# Altium PCB PCBenDIM.PcbDoc (part 1 of 3)
Units mil, origin at the board's own origin, x right, y up, seen from the top; angles counter-clockwise.
Board outline 3937.01 x 3149.61 mil, 2 copper layers (Top Layer, Bottom Layer); 105 components, 104 nets, 450 pads, 157 vias.
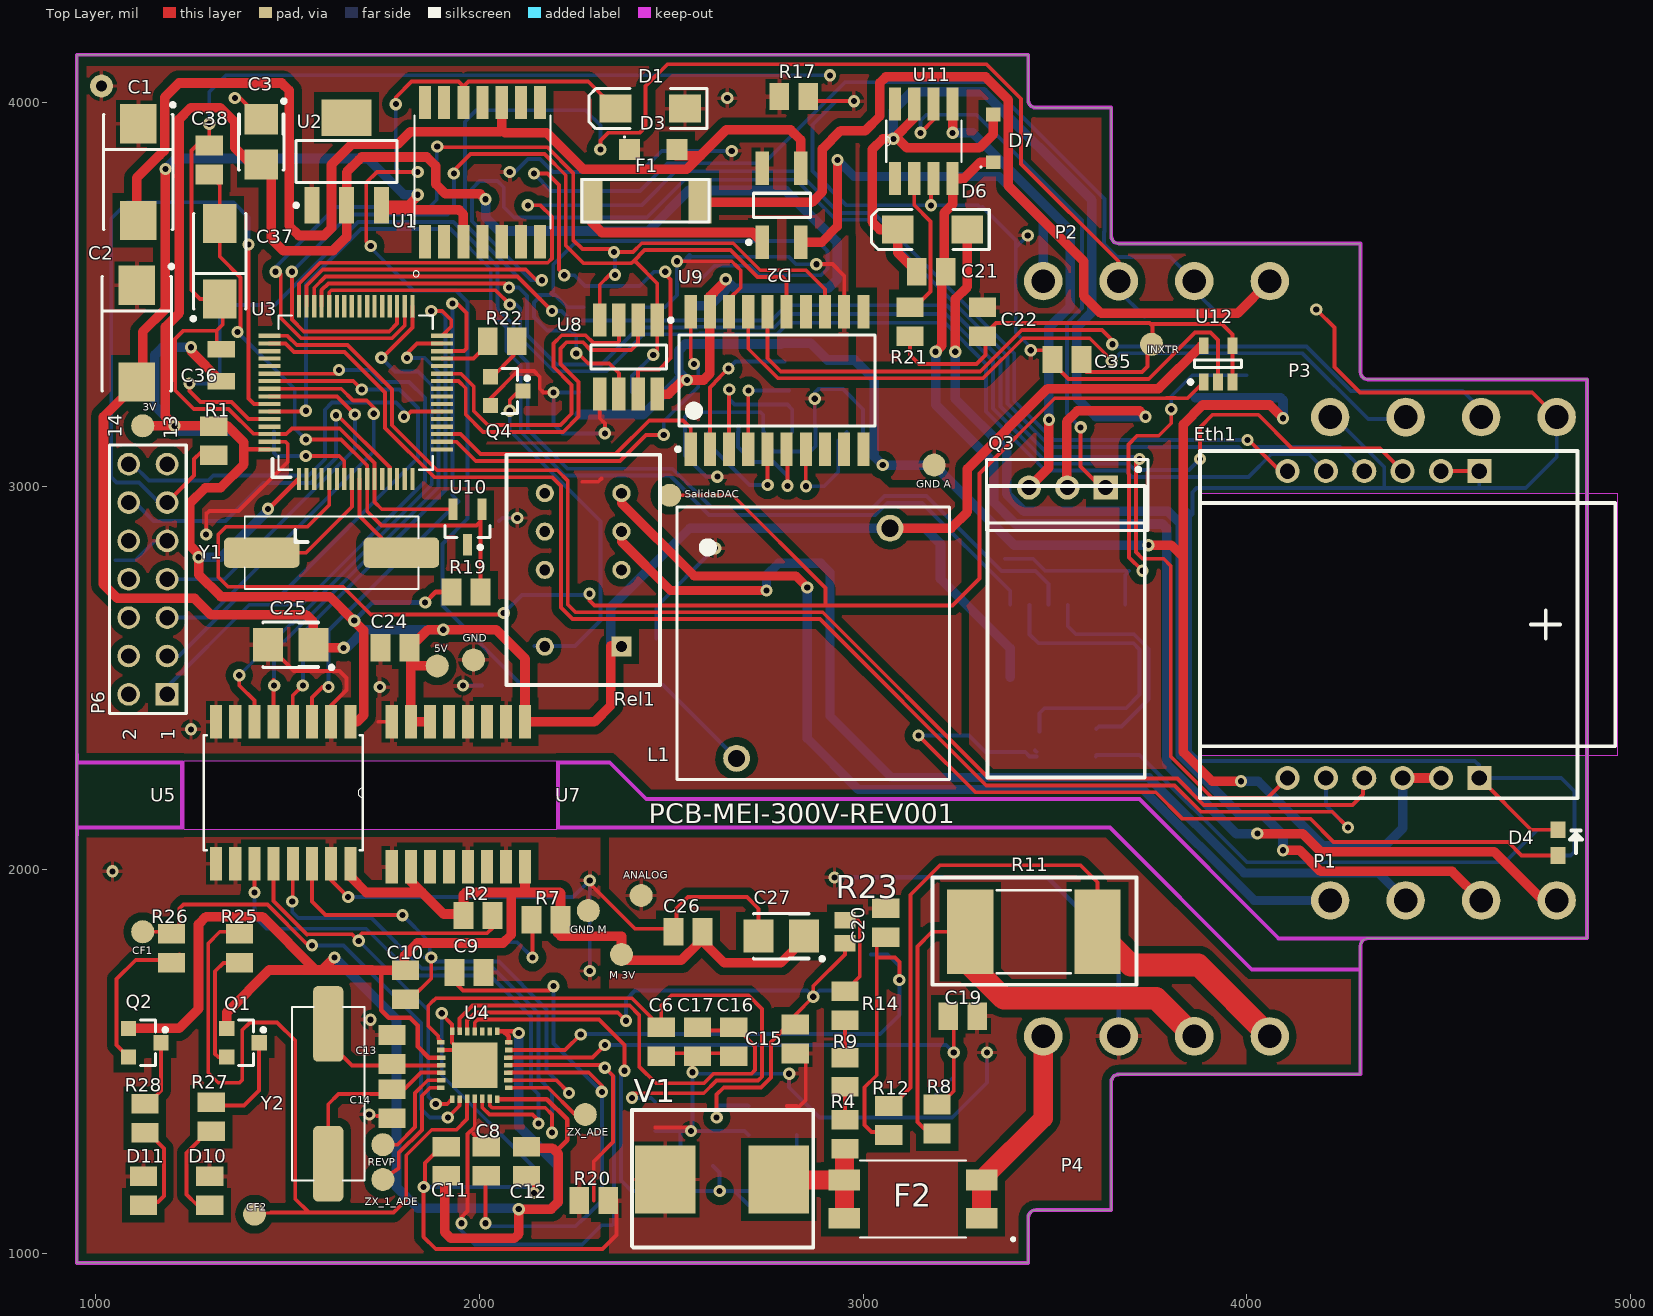
[diagram p0: Top Layer view]
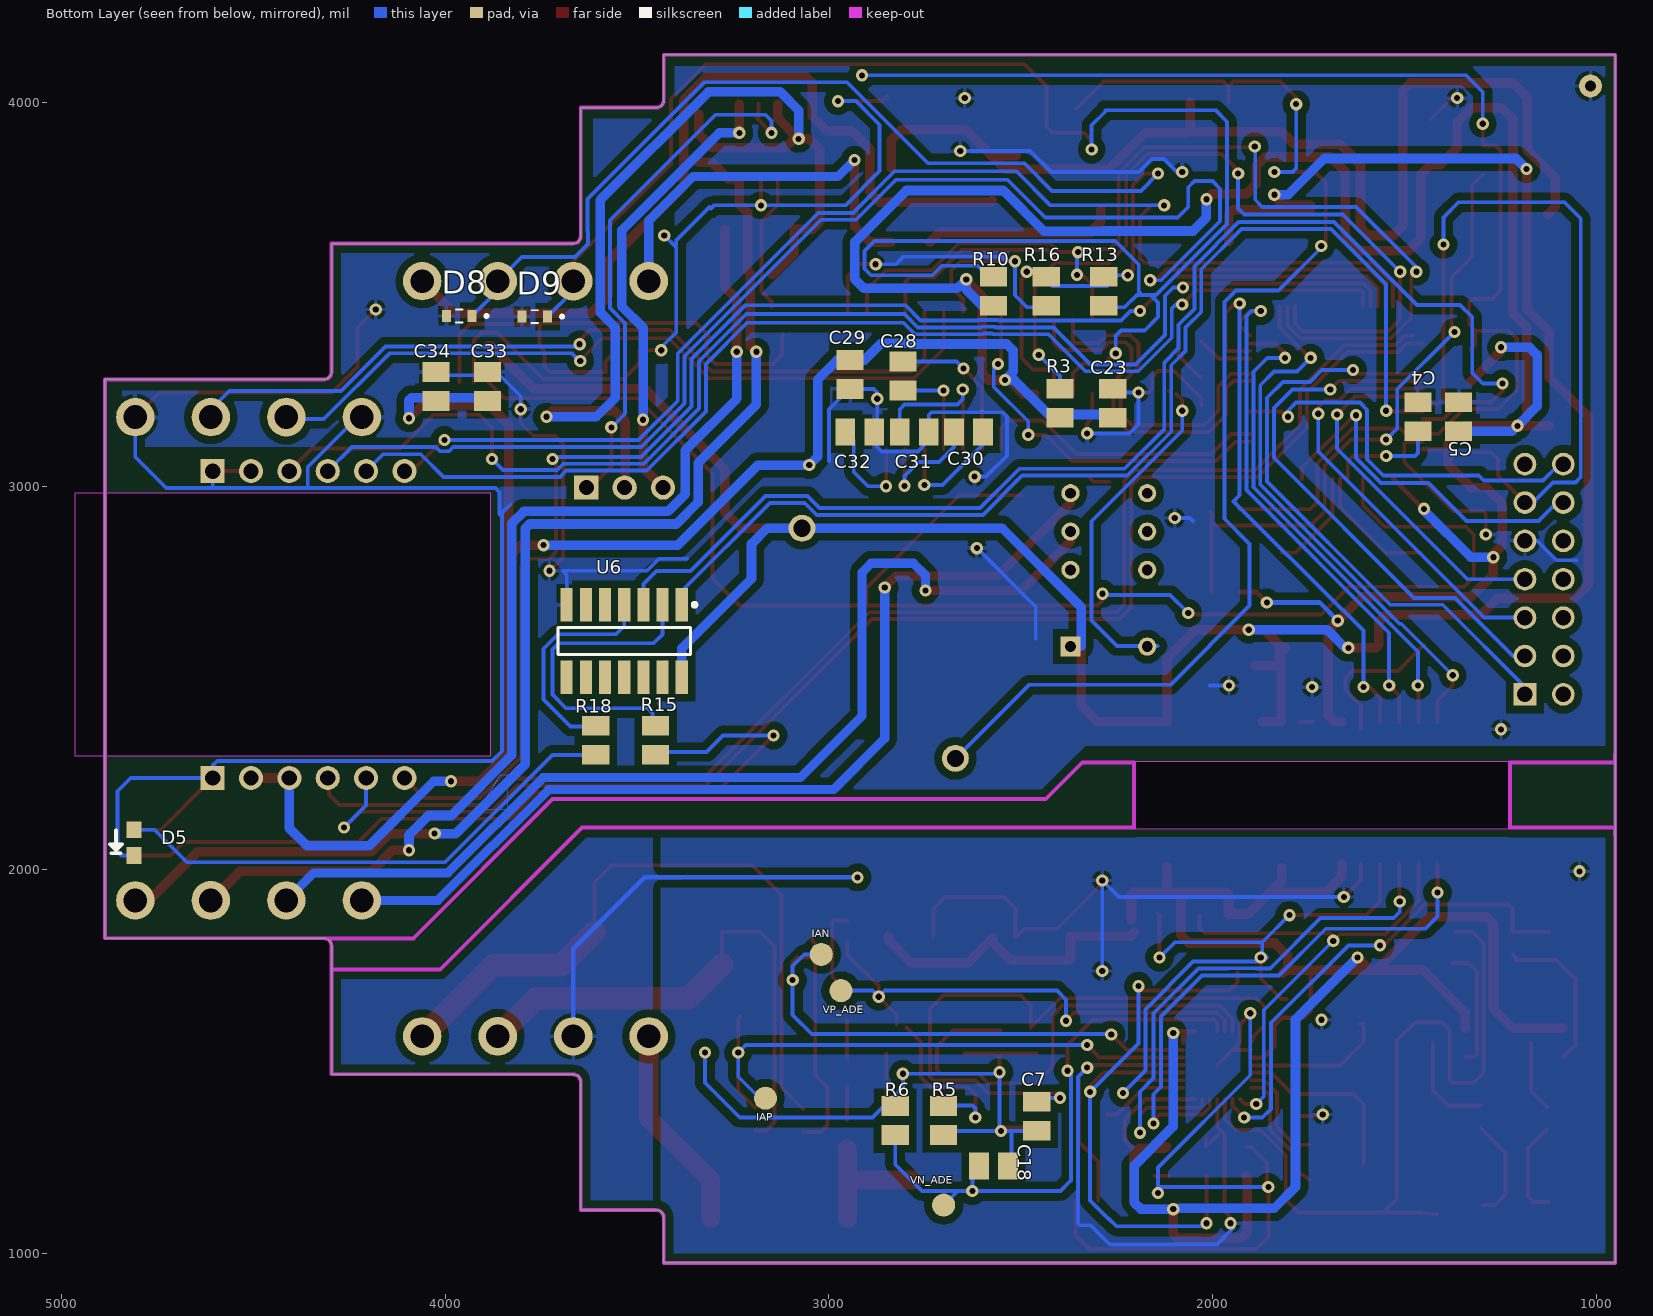
[diagram p1: Bottom Layer view, seen from below]

## Layer stack, top to bottom
Top Solder: solder mask 0.4, Solder Resist, Dk 3.5
Top Layer: signal copper 1.4
Dielectric 1: dielectric 12.6, FR-4, Dk 4.8
Bottom Layer: signal copper 1.4
Bottom Solder: solder mask 0.4, Solder Resist, Dk 3.5

## Board outline
4296.46,3298.03 4296.46,3632.68 3666.54,3632.68 3662.16,3633.17 3658,3634.63 3654.26,3636.97 3651.15,3640.09 3648.8,3643.82 3647.34,3647.98 3646.85,3652.36 3646.85,3987.01 3450,3987.01 3445.62,3987.5 3441.46,3988.96 3437.73,3991.3 3434.61,3994.42 3432.27,3998.15 3430.81,4002.31 3430.32,4006.69 3430.32,4124.8 950,4124.8 950,975.2 3430.32,975.2 3430.32,1093.31 3430.81,1097.69 3432.27,1101.85 3434.61,1105.58 3437.73,1108.7 3441.46,1111.04 3445.62,1112.5 3450,1112.99 3646.85,1112.99 3646.85,1447.05 3647.34,1451.42 3648.8,1455.58 3651.14,1459.31 3654.25,1462.43 3657.98,1464.78 3662.14,1466.23 3666.52,1466.73 4296.46,1467.32 4296.46,1801.97 4296.95,1806.35 4298.41,1810.51 4300.75,1814.24 4303.87,1817.36 4307.6,1819.7 4311.76,1821.16 4316.14,1821.65 4887.01,1821.65 4887.01,3278.35 4316.14,3278.35 4311.76,3278.84 4307.6,3280.3 4303.87,3282.64 4300.75,3285.76 4298.41,3289.49 4296.95,3293.65
cut-out: 3881.89,2982.28 4965.64,2982.28 4965.64,2297.64 3881.89,2297.64
cut-out: 1228.35,2283.46 1228.35,2106.3 2200.79,2106.3 2200.79,2283.46

## Design rules (kind name [scope] priority, off if disabled: settings)
Clearance Poly [InPolygon] p1: gap=20.47 ignorepadtopadclearanceinfootprint=FALSE except(0: Arc-Hole Track-Hole SMDPad-Hole THPad-Hole Via-Hole Fill-Hole Poly-Hole Region-Hole Text-Hole)
Clearance Clearancedos [HasPad('U3-*','U4-*') vs HasPad('U3-*','U4-*')] p2 off: gap=7.87 ignorepadtopadclearanceinfootprint=FALSE except(0: Arc-Hole Track-Hole SMDPad-Hole THPad-Hole Via-Hole Fill-Hole Poly-Hole Region-Hole Text-Hole; 3.94: Arc-SMDPad Track-SMDPad SMDPad-SMDPad)
Clearance [All] p3: gap=7.87 ignorepadtopadclearanceinfootprint=FALSE except(0: Arc-Hole Track-Hole SMDPad-Hole THPad-Hole Via-Hole Fill-Hole Poly-Hole Region-Hole Text-Hole; 5.91: Arc-SMDPad Track-SMDPad SMDPad-SMDPad)
MinimumSolderMaskSliver [All] p1: minsoldermaskwidth=0.04
PolygonConnect [All] p1: connectstyle=Relief reliefconductorwidth=10 reliefentries=4 polygonreliefangle="90 Angle" airgapwidth=10
RoutingVias [All] p1: holewidth=16 width=32 viastyle="Through Hole" minholewidth=16 minwidth=32 maxholewidth=16 maxwidth=32
SilkToSilkClearance [All] p1: silktosilkclearance=0
SilkToSolderMaskClearance [IsPad] p1: minsilkscreentomaskgap=0 clearancetoexposedcopper=TRUE
SolderMaskExpansion [All] p1: expansion=3.94
Width 4milimeter [InNet('NetQ3_3','NetC21_2','SAL3','SAL4')] p1: maxlimit=27.56 minlimit=25 preferedwidth=25 minimp=50.000000 maximp=50.000000 favimp=50.000000
Width [InAnyNet and not InNet('M_V3V3','V3V3','NetP1_4','NetP1_3','V5')   and not InNet('CURRENT_MEASUREMENTA','CURRENT_MEASUREMENTB')  and not InNet('AC_N_MEDIDOR','AC_p_MEDIDOR')  and not InNet('NetQ4_3')] p2: maxlimit=60 minlimit=10 preferedwidth=10 minimp=50.000000 maximp=50.000000 favimp=50.000000
Width 3Vade [InNet('M_V3V3','V3V3','NetP1_4','NetP1_3','V5')] p3: maxlimit=80 minlimit=12 preferedwidth=12 minimp=50.000000 maximp=50.000000 favimp=50.000000
27 further rules are at their usual default settings.

## Classes and differential pairs
component class Alimentacion: C1 C2 C3 C24 C25 C26 C27 D1 D2 D3 F1 L1 P1 P2 U1 U2 U7
component class CircuitoMedidorADE: C6 C7 C8 C9 C10 C11 C12 C13 C14 C16 C17 D10 D11 Q1 Q2 R2 R7 R20 R25 R26 R27 R28 U4 U5 Y2
component class comms: C23 C28 C29 C30 C31 C32 C33 C34 D4 D5 D8 D9 Eth1 P3 R3 R10 R13 R15 R16 R18 U6 U8 U9
component class Micro: C4 C5 C36 C37 C38 P6 R1 R17 R19 U3 U10 Y1
component class ParteAnalogicaMedicion: C15 C18 C19 C20 F2 P4 R4 R5 R6 R8 R9 R11 R12 R14 R23 V1
component class "Relay y salida analógica": C21 C22 C35 D6 D7 Q3 Q4 R21 R22 Rel1 U11 U12

## Components (designator, comment, footprint, x,y, rotation, side; value= is the part's Value field where it differs from the comment)
C1 "Cap Semi" 7343 1110.24,3818.9 r270 top value=22uF
C2 "Cap Semi" 7343 1106.3,3397.64 r270 top value=220uF
C3 "Cap Semi" 3528 1430.94,3897.64 r270 top value=10uF
C4 "Cap Semi" Custom0805 1464.57,3181.1 r270 bottom value=0.1uF
C5 "Cap Semi" Custom0805 1358.27,3181.1 r270 bottom value=0.1uF
C6 "Cap Pol3" Custom0805 2473.62,1551.57 r270 top value=4.7uF
C7 "Cap" Custom0805 2457.87,1357.48 r90 bottom value=0.1uF
C8 "Cap Pol3" Custom0805 2017.72,1240.16 r90 top value=4.7uF
C9 "Cap" Custom0805 1972.44,1732.28 r180 top value=0.1uF
C10 "Cap" Custom0805 1807.09,1700.79 r90 top value=1uF
C11 "Cap Pol3" Custom0805 1913.39,1240.16 r90 top value=10uF
C12 "Cap" Custom0805 2122.05,1240.16 r90 top value=100nF
C13 "Cap" Custom0805 1771.65,1531.5 r270 top value=20p
C14 "Cap" Custom0805 1771.65,1389.76 r90 top value=20p
C15 "Cap" Custom0805 2822.83,1559.06 r90 top value=33nF
C16 "Cap Pol3" Custom0805 2662.6,1551.57 r270 top value=4.7uF
C17 "Cap" Custom0805 2568.11,1551.57 r90 top value=0.1uF
C18 "Cap" Custom0805 2570.87,1228.35 r180 bottom value=33nF
C19 "Cap" Custom0805 3259.84,1618.11 r180 top value=33nF
C20 "Cap" Custom0805 3059.06,1862.2 r90 top value=33nF
C21 "Cap Semi" Custom0805 3177.17,3559.06 r180 top value=10nF
C22 "Cap Semi" Custom0805 3311.02,3429.13 r270 top value=10uF
C23 "Cap Semi" Custom0805 2259.84,3216.54 r270 bottom value=10uF
C24 "Cap" Custom0805 1779.53,2578.74 r0 top value=100nF
C25 "Cap Pol3" 3528 1507.87,2586.61 r180 top value=10uF
C26 "Cap" Custom0805 2543.31,1838.58 r0 top value=100nF
C27 "Cap Pol3" 3528 2786.61,1827.17 r180 top value=10uF
C28 "C Pol" Custom0805 2807.09,3287.4 r270 bottom value=0.1uF
C29 "Bypass" Custom0805 2944.88,3291.34 r270 bottom value=0.1uF
C30 "C Pol" Custom0805 2635.83,3141.73 r0 bottom value=0.1uF
C31 "C Pol" Custom0805 2777.56,3141.73 r180 bottom value=0.1uF
C32 "C Pol" Custom0805 2919.29,3141.73 r180 bottom value=0.1uF
C33 "Cap Pol3" Custom0805 3889.91,3259.84 r90 bottom value=4.7uF
C34 "Cap" Custom0805 4023.76,3259.84 r90 bottom value=0.1uF
C35 "Cap Semi" Custom0805 3531.5,3330.71 r0 top value=1000pF
C36 "Cap input" CUSTOM0805 1326.77,3314.96 r90 top value=0.1uF
C37 "Cap out" TC6032-2412 1322.83,3586.61 r90 top value=10uF
C38 "C" Custom0805 1295.28,3850.39 r270 top value=0.1uF
D1 "10MQ06n" DO214 2444.88,3984.25 r180 top
D2 "MB2SCT-ND" SOIC4_M 2787.4,3732.28 r90 top
D3 "BZT52C30-F" 1N4148W#1 2452.76,3877.95 r0 top
D4 "LED3" *0603 4811.02,2070.87 r90 top
D5 "LED3" *0603 4811.02,2070.87 r270 bottom
D6 "ss14" DO214 3181.1,3669.29 r180 top
D7 "BZT52C30-F" 1N4148W#2 3339.37,3907.09 r90 top
D8 "ESD5B5.0S" DIO_XBS053V15R-G 3963.39,3443.82 r0 bottom
D9 "ESD5B5.0S" DIO_XBS053V15R-G 3766.54,3442.01 r0 bottom
D10 "LED2" Custom0805 1296.85,1163.39 r90 top
D11 "LED2" Custom0805 1123.62,1163.39 r90 top
Eth1 "wiz8" wiz8 4106.3,3039.37 r270 top
F1 "Fuse" SMD030F 2433.07,3744.09 r180 top
F2 "TSM600-250F-2" *SOIC254P1016X440-4N 3129.92,1141.73 r180 top
L1 "Inductor" PE-526XXNL 2870.08,2590.55 r0 top value=330uH
P1 "Header 4" ConectorPrsr 4808.07,1920.28 r180 top
P2 "Header 4" ConectorPrsr 3469.49,3534.45 r0 top
P3 "Header 4" ConectorPrsr 4217.52,3180.12 r0 top
P4 "Header 4" ConectorPrsr 4060.04,1565.94 r180 top
P6 "Header 7X2" HDR2X7 1185.43,2457.48 r90 top
Q1 "BCV26" SOT23_L 1383.46,1549.21 r0 top
Q2 "BCV26" SOT23_L 1127.56,1549.21 r0 top
Q3 "TIP31C" TO-220AB 3532.28,2996.46 r180 top
Q4 "BCV27" SOT23_L 2070.87,3248.03 r0 top
R1 "Res3" Custom0805 1307.09,3118.11 r270 top value=100K
R2 "Res3" Custom0805 1996.06,1880.91 r180 top value=10K
R3 "Rpullup" Custom0805 2397.64,3216.54 r90 bottom value=100
R4 "Res3" Custom0805 2952.76,1311.02 r90 top value=390K
R5 "Res3" Custom0805 2700.79,1346.46 r90 bottom value=1K
R6 "Res3" Custom0805 2826.77,1346.46 r90 bottom value=1K
R7 "Res3" Custom0805 2173.23,1870.08 r0 top value=10K
R8 "Low tolerance resist" Custom0805 3192.91,1350.39 r270 top value=1k
R9 "Res3" Custom0805 2952.76,1472.44 r90 top value=330K
R10 "Rb" Custom0805 2570.87,3507.87 r90 bottom value=75
R11 "Res Shunt" RESC1000X525X52L180M 3444.88,1838.58 r0 top value=0.01
R12 "Low tolerance resistor" Custom0805 3066.93,1346.46 r90 top value=1k
R13 "RT" Custom0805 2283.46,3507.87 r90 bottom value=600
R14 "Res3" Custom0805 2952.76,1645.67 r90 top value=330K
R15 "Res3" Custom0805 3451.57,2337.4 r90 bottom value=470
R16 "Rb" Custom0805 2433.07,3507.87 r270 bottom value=75
R17 "Res3" Custom0805 2818.9,4015.75 r0 top value=0
R18 "Res3" Custom0805 3607.48,2337.4 r90 bottom value=470
R19 "Res3" Custom0805 1964.57,2724.41 r180 top value=160
R20 "Res3" Custom0805 2297.64,1137.8 r0 top value=0
R21 "Res3" Custom0805 3122.05,3429.13 r270 top value=20k
R22 "Rb" Custom0805 2059.06,3377.95 r0 top value=100K
R23 "Res3" C0805 2952.76,1838.58 r270 top value=330K
R25 "Rb" Custom0805 1374.02,1795.28 r90 top value=10K
R26 "Rb" Custom0805 1196.85,1795.28 r90 top value=10K
R27 "Res3" Custom0805 1300.79,1356.3 r90 top value=500
R28 "Res3" Custom0805 1127.56,1352.36 r90 top value=500
Rel1 "Fujitsu Rele" Rele_Fujtsu 2370.08,2881.89 r90 top
U1 "LM2574" SOIC127P1033X264-14N 2007.87,3818.9 r90 top
U2 "LM1117IMPX-3.3" MP04A_N 1653.54,3846.46 r90 top
U3 "MSP430F2618" QFP50P1200X1200X160-64N 1677.17,3244.09 r90 top
U4 "ADE7953" *LFCSP28_ADE7953(Primary) 1987.4,1490.94 r180 top
U5 "aDUM1412" *SOIC127P1032X265-16N 1488.19,2200.79 r270 top
U6 "SN74LS04D" 751A-03_N 3533.46,2596.46 r270 bottom
U7 "ADUM5000" *SO16W 1944.88,2196.85 r180 top
U8 "ISL83485" SO8_M 2388.39,3336.61 r270 top
U9 "MAX3222CDW" SOIC20_N 2775.59,3275.59 r90 top
U10 "LM4040 2.5V SOT-23" SOT23_M 1968.5,2893.7 r270 top
U11 "XTR115UA/2K5E4" *SOIC127P600X175-8N 3158.27,3899.21 r90 top
U12 "LPV321M5" MF05A_N 3925.2,3318.9 r90 top
V1 "V420SM7" PCBComponent_1 2870.08,1015.75 r180 top
Y1 "XTAL" XTAL1140X475X430D1315L440X63M 1614.17,2826.77 r180 top
Y2 "XTAL 3.58MHZ" XTAL1140X475X430D1315L440X63M 1605.51,1416.14 r270 top

## Footprints (in the part's own frame and the unit in brackets; to place one, negate y for a bottom-side part, rotate by r counter-clockwise, add the part's x,y. Pads: shape width x height; smd on the part's side, far side on the other; paste and mask are expansions set on the pad)
1N4148W#1 [mil] "SOD123 1N4148W BAV16W"
  rect 55x55 smd: 1(-62.01,0) 2(62.01,0)
  silkscreen extent -77,30 -73,34, body extent -56,-33 56,33, height 53
1N4148W#2 [mil] "SOD123 1N4148W BAV16W"
  rect 35.43x37.4 smd: 1(-62.01,0) 2(62.01,0)
  silkscreen extent -77,30 -73,34, body extent -56,-33 56,33, height 53
751A-03_N [mm] "SOIC, 14-Leads, Body 8.7x3.9mm, Pitch 1.27mm, IPC Medium Density"
  rect 2.2x0.8 smd: 1(-2.4,3.81) 2(-2.4,2.54) 3(-2.4,1.27) 4(-2.4,0) 5(-2.4,-1.27) 6(-2.4,-2.54) 7(-2.4,-3.81) 8(2.4,-3.81) 9(2.4,-2.54) 10(2.4,-1.27) 11(2.4,0) 12(2.4,1.27) 13(2.4,2.54) 14(2.4,3.81)
  silkscreen extent -2.52,-4.4 0.9,4.78, body extent -2,-4.38 2,4.38, height 1.75
3528 [mm] "Capacitor, SM Tantalum; Body 3.5 x 2.8 mm (LxW typ)"
  rect 2x2.2 smd: 1(-1.5,0) 2(1.5,0)
  silkscreen extent -2.82,-1.5 1.85,1.63
7343 [mm] "Capacitor, SM Tantalum; Body 7.3 x 4.3 mm (LxW typ)"
  rect 2.6x2.4 smd: 1(-3.2,0) 2(3.2,0)
  silkscreen extent -4.57,-2.3 3.8,2.43
*0603 [mm] "Photosensitive Diode; 2 Leads"
  rect 1.1x1 smd: 1(-0.85,0) 2(0.85,0)
*LFCSP28_ADE7953(Primary) [mm]
  rect 0.5x0.3 smd: 1(-2.25,1.5) 6(-2.25,-1) 7(-2.25,-1.5) 15(2.25,-1.5) 16(2.25,-1) 21(2.25,1.5)
  rect 0.55x0.3 smd: 2(-2.225,1) 3(-2.225,0.5) 4(-2.225,0) 5(-2.225,-0.5) 17(2.225,-0.5) 18(2.225,0) 19(2.225,0.5) 20(2.225,1)
  rect 0.3x0.5 smd: 8(-1.5,-2.25) 13(1,-2.25) 14(1.5,-2.25) 22(1.5,2.25) 23(1,2.25) 28(-1.5,2.25)
  rect 0.3x0.55 smd: 9(-1,-2.225) 10(-0.5,-2.225) 11(0,-2.225) 12(0.5,-2.225) 24(0.5,2.225) 25(0,2.225) 26(-0.5,2.225) 27(-1,2.225)
  rect 3x3 smd: EXP(0,0)
*SO16W [mm]
  rect 0.8x2.2 smd: 1(-4.41,-4.8) 2(-3.15,-4.8) 3(-1.89,-4.8) 4(-0.63,-4.8) 5(0.63,-4.8) 6(1.89,-4.8) 7(3.15,-4.8) 8(4.41,-4.8) 9(4.41,4.8) 10(3.15,4.8) 11(1.89,4.8) 12(0.63,4.8) 13(-0.63,4.8) 14(-1.89,4.8) 15(-3.15,4.8) 16(-4.41,4.8)
*SOIC127P600X175-8N [mm]
  rect 2.2x0.8 smd: 1(-2.464,1.905) 2(-2.464,0.635) 3(-2.464,-0.635) 4(-2.464,-1.905) 5(2.464,-1.905) 6(2.464,-0.635) 7(2.464,0.635) 8(2.464,1.905)
  silkscreen extent -1.37,-2.49 1.37,2.49
*SOIC127P1032X265-16N [mil]
  rect 86.61x31.5 smd: 1(-185,175) 2(-185,125) 3(-185,75) 4(-185,25) 5(-185,-25) 6(-185,-75) 7(-185,-125) 8(-185,-175) 9(185,-175) 10(185,-125) 11(185,-75) 12(185,-25) 13(185,25) 14(185,75) 15(185,125) 16(185,175)
  silkscreen extent -150,-207 150,207
*SOIC254P1016X440-4N [mm]
  rect 2.09x1.39 smd: 1(-4.54,-1.27) 1(-4.54,1.27) 2(4.54,-1.27) 2(4.54,1.27)
  silkscreen extent -6.73,-2.55 3.5,2.76
C0805 [mm] "Chip Capacitor, Body 2.0x1.3mm, IPC High Density"
  rect 1.1x1.4 smd: 1(-0.75,0) 2(0.75,0)
  body extent -1.1,-0.72 1.1,0.72, height 1.4
ConectorPrsr [mm]
  round 2.54 hole 1.575: 1(0,0) 3(10,0) 4(15,0)
  oval 2.54x2.57 hole 1.575: 2(5,0)
  body extent 0,2 15,7, height 20
Custom0805 [mm] "Un 0805 mas amplio"
  rect 1.3x1.8 smd: 1(-0.96,0) 2(0.96,0)
  body extent -1.21,-0.65 1.21,0.65, height 1.5
CUSTOM0805 [mm] "Un 0805 mas amplio"
  rect 1.1x1.8 smd: 1(1.06,0) 2(-1.06,0)
  body extent -1.21,-0.65 1.21,0.65, height 1.5
DIO_XBS053V15R-G [mm]
  rect 0.6x0.8 smd: A(0.85,0) C(-0.85,0)
  silkscreen extent -1.9,-0.43 0.22,0.43
DO214 [mm] "DO-214-AC/SMA; 2 C-Bend Leads; Body 5.3 x 2.6 mm, inc. leads (LxW)"
  rect 2.1x1.85 smd: 1(-2.3,0) 2(2.3,0)
  silkscreen extent -3.75,-1.33 4.05,1.33
HDR2X7 [mm] "Connector; Header; 7x2 Position"
  rect 1.5x1.5 hole 1.02: 1(0,0)
  round 1.5 hole 1.02: 2(0,2.54) 3(2.54,0) 4(2.54,2.54) 5(5.08,0) 6(5.08,2.54) 7(7.62,0) 8(7.62,2.54) 9(10.16,0) 10(10.16,2.54) 11(12.7,0) 12(12.7,2.54) 13(15.24,0) 14(15.24,2.54)
  silkscreen extent -1.27,-1.27 16.51,3.81
MF05A_N [mm] "SOT23, 5-Leads, Body 2.9x1.6mm, Pitch 0.95mm, Lead Span 2.8mm, IPC Medium Density"
  rect 1.1x0.65 smd: 1(-1.2,0.95) 2(-1.2,0) 3(-1.2,-0.95) 4(1.2,-0.95) 5(1.2,0.95)
  silkscreen extent -1.32,-1.55 0.25,1.95, body extent -0.9,-1.55 0.9,1.55, height 1.19
MP04A_N [mm] "SOT223, 4-Leads, Body 6.5x3.5mm, Pitch 2.3mm, Lead Span 7mm, IPC Medium Density"
  rect 2.4x1 smd: 1(-2.9,2.3) 2(-2.9,0) 3(-2.9,-2.3)
  rect 2.4x3.3 smd: 4(2.9,0)
  silkscreen extent -3.02,-3.35 1.4,3.47, body extent -1.85,-3.35 1.85,3.35, height 1.8
PCBComponent_1 [mm]
  rect 4x4.5 smd: 1(2.3,-4.5) 2(9.8,-4.5)
  silkscreen extent 0,-9.1 12,0
PE-526XXNL [mm] "Unshielded Toroidal Inductor, Corner Terminals"
  round 1.78 hole 1.14: 1(5.08,7.62) 2(-5.08,-7.62)
  silkscreen extent -9.01,-9.01 9.02,9.01, body extent -9.02,-9.02 8.89,8.89, height 2.45
QFP50P1200X1200X160-64N [mil]
  rect 58x11 smd: 1(-225,148) 2(-225,128) 3(-225,108) 4(-225,89) 5(-225,69) 6(-225,49) 7(-225,30) 8(-225,10) 9(-225,-10) 10(-225,-30) 11(-225,-49) 12(-225,-69) 13(-225,-89) 14(-225,-108) 15(-225,-128) 16(-225,-148) 33(225,-148) 34(225,-128) 35(225,-108) 36(225,-89) 37(225,-69) 38(225,-49) 39(225,-30) 40(225,-10) 41(225,10) 42(225,30) 43(225,49) 44(225,69) 45(225,89) 46(225,108) 47(225,128) 48(225,148)
  rect 11x58 smd: 17(-148,-225) 18(-128,-225) 19(-108,-225) 20(-89,-225) 21(-69,-225) 22(-49,-225) 23(-30,-225) 24(-10,-225) 25(10,-225) 26(30,-225) 27(49,-225) 28(69,-225) 29(89,-225) 30(108,-225) 31(128,-225) 32(148,-225) 49(148,225) 50(128,225) 51(108,225) 52(89,225) 53(69,225) 54(49,225) 55(30,225) 56(10,225) 57(-10,225) 58(-30,225) 59(-49,225) 60(-69,225) 61(-89,225) 62(-108,225) 63(-128,225) 64(-148,225)
  silkscreen extent -201,-201 201,201
Rele_Fujtsu [mm]
  rect 1.308x1.308 hole 0.711: 1(-7.62,0)
  round 1.2 hole 0.711: 3(-2.54,0) 4(0,0) 5(2.54,0) 8(2.54,5.08) 9(0,5.08) 10(-2.54,5.08) 12(-7.62,5.08)
  silkscreen extent -10.16,-2.54 5.08,7.62
RESC1000X525X52L180M [mm] "Resistor, Chip; 10.00 mm L X 5.25 mm W X 0.52 mm H body"
  rect 3.07x5.61 smd: 1(-4.22,0) 2(4.22,0)
  silkscreen extent -2.46,-2.75 2.46,2.75
SMD030F [mm] "SMD2 Package creo"
  rect 1.5x3 smd: 1(-3.6,0) 2(3.6,0)
  silkscreen extent -4.2,-1.4 4.2,1.4, body extent -3.81,-1.22 3.76,1.32, height 1.75
SO8_M [mm] "SOIC, 8-Leads, Body 4.9x3.9mm, Pitch 1.27mm, IPC Low Density"
  rect 2.2x0.9 smd: 1(-2.45,1.905) 2(-2.45,0.635) 3(-2.45,-0.635) 4(-2.45,-1.905) 5(2.45,-1.905) 6(2.45,-0.635) 7(2.45,0.635) 8(2.45,1.905)
  silkscreen extent -2.57,-2.5 0.8,2.93, body extent -2,-2.5 2,2.5, height 1.75
SOIC4_M [mm] "4-Pin Small Outline Integrated Circuit Package (SOIC4), IPC Low Density"
  rect 2.2x0.9 smd: 1(-2.45,1.27) 2(-2.45,-1.27) 3(2.45,-1.27) 4(2.45,1.27)
  silkscreen extent -2.57,-1.9 0.8,2.29, body extent -2,-1.91 2,1.87, height 1.75
SOIC20_N [mm] "20-Pin Small Outline Integrated Circuit (SOIC20), IPC Medium Density"
  rect 2.2x0.8 smd: 1(-4.55,5.715) 2(-4.55,4.445) 3(-4.55,3.175) 4(-4.55,1.905) 5(-4.55,0.635) 6(-4.55,-0.635) 7(-4.55,-1.905) 8(-4.55,-3.175) 9(-4.55,-4.445) 10(-4.55,-5.715) 11(4.55,-5.715) 12(4.55,-4.445) 13(4.55,-3.175) 14(4.55,-1.905) 15(4.55,-0.635) 16(4.55,0.635) 17(4.55,1.905) 18(4.55,3.175) 19(4.55,4.445) 20(4.55,5.715)
  silkscreen extent -4.67,-6.5 3,6.69, body extent -3.75,-6.4 3.75,6.4, height 2.65
SOIC127P1033X264-14N [mm]
  rect 2.2x0.8 smd: 1(-4.615,3.81) 2(-4.615,2.54) 3(-4.615,1.27) 4(-4.615,0) 5(-4.615,-1.27) 6(-4.615,-2.54) 7(-4.615,-3.81) 8(4.615,-3.81) 9(4.615,-2.54) 10(4.615,-1.27) 11(4.615,0) 12(4.615,1.27) 13(4.615,2.54) 14(4.615,3.81)
  silkscreen extent -6.93,-4.5 3.75,4.6
SOT23_L [mm] "SOT23, 3-Leads, Body 2.9x1.3mm, Pitch 0.95mm, Lead Span 2.3mm - Reverse Pinning, IPC High Density"
  rect 1x1 smd: 1(1.075,0) 2(-1.075,-0.95) 3(-1.075,0.95)
  silkscreen extent -0.3,-1.5 1.48,1.5, body extent -0.7,-1.5 0.7,1.5, height 1.1
SOT23_M [mm] "SOT23, 3-Leads, Body 2.9x1.3mm, Pitch 0.95mm, Lead Span 2.3mm - Reverse Pinning, IPC Low Density"
  rect 1.45x0.6 smd: 1(-1.175,0.95) 2(-1.175,-0.95) 3(1.175,0)
  silkscreen extent -0.1,-1.5 1.47,1.5, body extent -0.7,-1.5 0.7,1.5, height 1.1
TC6032-2412 [mm] "Capacitor, SM Tantalum; Body 6.0 x 3.2 mm (LxW typ)"
  rect 2.6x2.2 smd: 1(-2.5,0) 2(2.5,0)
  silkscreen extent -3.92,-1.75 3.15,1.87
TO-220AB [mm] "TO, Thru-Hole, Vertical, Heatsink Mounted; 3 In-Line Leads; Pitch 2.54 mm"
  rect 1.6x1.6 hole 1: 1(-2.54,0)
  round 1.6 hole 1: 2(0,0) 3(2.54,0)
  silkscreen extent -5.35,-1.85 5.35,2.85, body extent -5.4,-1.9 5.4,2.9, height 19.3
wiz8 [mm]
  rect 1.59x1.59 hole 1.02: 1(0,12.7) 7(20.32,12.7)
  round 1.59 hole 1.02: 2(0,10.16) 3(0,7.62) 4(0,5.08) 5(0,2.54) 6(0,0) 8(20.32,10.16) 9(20.32,7.62) 10(20.32,5.08) 11(20.32,2.54) 12(20.32,0)
  silkscreen extent -1.34,-5.8 21.66,21.7
XTAL1140X475X430D1315L440X63M [mm] "Crystal; 11.40 mm L X 4.75 mm W X 4.30 mm H body"
  rrect32% 5x2 smd: 1(-4.625,0) 2(4.625,0)
  silkscreen extent -5.75,-2.4 5.75,2.4, body extent -6.58,-2.38 6.57,2.37, height 4.3

## Part data
C1 C2 C3 C4 C5 C21 C22 C23 C35: "Capacitor (Semiconductor SIM Model)", LatestRevisionDate=29-May-2009, LatestRevisionNote="IPC-7351 Footprint Added.", PackageDescription="Chip Capacitor", PackageReference=C1206, Published=8-Jun-2000, Publisher="Altium Limited"
C6 C8 C11 C16 C25 C27 C33: "Polarized Capacitor (Surface Mount)", LatestRevisionDate=29-May-2009, LatestRevisionNote="IPC-7351 Footprint Added.", PackageDescription="Chip Capacitor", PackageReference=C0805, Published=8-Jun-2000, Publisher="Altium Limited"
C7 C9 C10 C12 C13 C14 C15 C17 C18 C19 C20 C24 C26 C34: "Capacitor", LatestRevisionDate=17-Jul-2002, LatestRevisionNote="Re-released for DXP Platform.", PackageDescription="Radial Cap, Thru-Hole; 2 Leads; 0.3 in Pin Spacing", PackageReference=RAD-0.3, Published=8-Jun-2000, Publisher="Altium Limited"
C28 C29 C30 C31 C32: library part "Cap Pol3", "Polarized Capacitor (Surface Mount)", LatestRevisionDate=29-May-2009, LatestRevisionNote="IPC-7351 Footprint Added.", PackageDescription="Chip Capacitor", PackageReference=C0805, Published=8-Jun-2000, Publisher="Altium Limited"
C36 C37 C38: library part "Cap Semi", "Capacitor (Semiconductor SIM Model)", LatestRevisionDate=29-May-2009, LatestRevisionNote="IPC-7351 Footprint Added.", PackageDescription="Chip Capacitor", PackageReference=C1206, Published=8-Jun-2000, Publisher="Altium Limited"
D1: library part "D Schottky", "Schottky Diode", Code_JEDEC=DO-214-AA, LatestRevisionDate=17-Jul-2002, LatestRevisionNote="Re-released for DXP Platform.", PackageDescription="DO-214-AA/SMB; 2 C-Bend Leads; Body 5.3 x 3.6 mm, inc. leads (LxW)", PackageReference=SMB, Published=8-Jun-2000, Publisher="Altium Limited"
D2: library part Bridge1, "Full Wave Diode Bridge - MB2S", DatasheetVersion=E2732B, LatestRevisionDate=29-May-2009, LatestRevisionNote="Sch pins A & K swapped.", PackageDescription="Bridge Rectifier; 4 Terminals; Body 9.4 x 9.4 mm (typ); Pitch 5.08 mm", PackageReference=D-38, Published=8-Jun-2000, Publisher="Altium Limited"
D3 D7: library part "D Zener", "Zener Diode SMD", LatestRevisionDate=17-Jul-2002, LatestRevisionNote="Re-released for DXP Platform.", PackageDescription="Diode, Thru-Hole; 2 Leads; 0.7 in Pin Spacing", PackageReference=DIODE-0.7, Published=8-Jun-2000, Publisher="Altium Limited"
D4 D5: "Typical BLUE SiC LED", DatasheetVersion=16-Apr-2002, LatestRevisionDate=17-Dec-2003, LatestRevisionNote="PCB Footprint replaced.", PackageDescription="SM LED; 2 C-Bend Leads; Body 3.5 x 2.8 x 1.9 mm, inc leads (LxWxH typ)", PackageReference=3.5X2.8X1.9, PackageVersion=16-Apr-2002, Published=8-Jun-2000, Publisher="Altium Limited"
D6: library part Diode, "Default Diode", Code_JEDEC=DO-214-AB, LatestRevisionDate=17-Jul-2002, LatestRevisionNote="Re-released for DXP Platform.", PackageDescription="DO-214-AB/SMC; 2 C-Bend Leads; Body 7.9 x 5.9 mm, inc. leads (LxW)", PackageReference=SMC, PackageVersion=Sep-1996, Published=8-Jun-2000, Publisher="Altium Limited"
D8 D9: library part XBS053V15R-G, "Diode Schottky 20V 500mA Surface Mount SOD-523", Package="SOD-523 Torex", Digi-Key_Part_Number=XBS053V15R-G-ND, Digi-Key_Purchase_URL=https://www.digikey.com/product-detail/en/torex-semiconductor-ltd/XBS053V15R-G/XBS053V15R-G-ND/2765022?utm_source=snapeda&utm_medium=aggregator&utm_campaign=symbol, MF=Torex, MP=XBS053V15R-G, SnapEDA_Link=https://www.snapeda.com/parts/XBS053V15R-G/Torex/view-part/808826/?ref=snap
D10 D11: "Typical RED, GREEN, YELLOW, AMBER GaAs LED", LatestRevisionDate=17-Jul-2002, LatestRevisionNote="Re-released for DXP Platform.", PackageDescription="SM LED; 2 Flat Leads", PackageReference=3.2X1.6X1.1, PackageVersion=Feb-2002, Published=8-Jun-2000, Publisher="Altium Limited"
F1: library part "Fuse 2", "SMD030-2CT-ND", LatestRevisionDate=17-Jul-2002, LatestRevisionNote="Re-released for DXP Platform.", PackageDescription="Thru-Hole; 2 Leads", PackageReference=PIN-W2/E2.8, Published=8-Jun-2000, Publisher="Altium Limited"
F2: library part "Fuse 2", "Fuse", LatestRevisionDate=17-Jul-2002, LatestRevisionNote="Re-released for DXP Platform.", PackageDescription="Thru-Hole; 2 Leads", PackageReference=PIN-W2/E2.8, Published=8-Jun-2000, Publisher="Altium Limited"
L1: "PE52627NL", Code_IEC=1005, Code_JEITA=0402, LatestRevisionDate=29-May-2009, LatestRevisionNote="IPC-7351 Footprint Added.", PackageDescription="Chip Inductor", PackageReference=0402-A, Published=8-Jun-2000, Publisher="Altium Limited"
P1 P2 P3 P4: "Header, 4-Pin", LatestRevisionDate=17-Jul-2002, LatestRevisionNote="Re-released for DXP Platform.", Publisher="Altium Limited"
P6: "Header, 7-Pin, Dual row", LatestRevisionDate=17-Jul-2002, LatestRevisionNote="Re-released for DXP Platform.", Publisher="Altium Limited"
Q1 Q2: library part PNP1, "PNP Darlington Bipolar Transistor", ComponentLink1Description="Manufacturer Link", ComponentLink1URL=http://www.zetex.com/, DatasheetVersion=May-1994, LatestRevisionDate=17-Jul-2002, LatestRevisionNote="Re-released for DXP Platform.", PackageDescription="TO, Flat Index; 3 In-Line, Axial Leads; Body Dia. 4.6mm; Lead Dia. 0.5 mm (max)", PackageReference=E3, PackageVersion=1995/1996, Published=8-Jun-2000, Publisher="Altium Limited"
Q3: library part NPN, "NPN Bipolar Transistor", Code_JEDEC=TO-226-AA, LatestRevisionDate=17-Jul-2002, LatestRevisionNote="Re-released for DXP Platform.", PackageDescription="TO, Flat Index; 3 In-Line, Axial Leads; Body Dia. 4.8mm; Leads 0.55 x 0.51 mm (max)", PackageReference=TO-226-AA, Published=8-Jun-2000, Publisher="Altium Limited"
Q4: library part NPN1, "NPN Darlington Bipolar Transistor", Code_JEDEC=TO-92, DatasheetVersion=1989, LatestRevisionDate=17-Jul-2002, LatestRevisionNote="Re-released for DXP Platform.", PackageDescription="TO, Flat Index; 3 In-Line, Axial Leads; Body Dia. 4.6mm; Leads 0.41 x 0.39 mm (max)", PackageReference=TO-92, PackageVersion=1989, Published=8-Jun-2000, Publisher="Altium Limited"
R1 R2 R4 R5 R6 R7 R9 R14 R15 R17 R18 R19 R20 R21 R23 R27 R28: "Resistor", LatestRevisionDate=29-May-2009, LatestRevisionNote="IPC-7351 Footprint Added.", PackageDescription="Chip Resistor", PackageReference=J1-0603, Published=8-Jun-2000, Publisher="Altium Limited"
R3 R8 R10 R11 R12 R13 R16 R22 R25 R26: library part Res3, "Resistor", LatestRevisionDate=29-May-2009, LatestRevisionNote="IPC-7351 Footprint Added.", PackageDescription="Chip Resistor", PackageReference=J1-0603, Published=8-Jun-2000, Publisher="Altium Limited"
Rel1: library part Rele_2, "FBR12ND-05"
U1: library part LM2574N-5, "Easy Switcher 0.5A Step-Down Voltage Regulator", ComponentLink1Description="Manufacturer Link", ComponentLink1URL=http://www.onsemi.com/site/products/taxonomy/0,4438,503,00.html, ComponentLink2Description=Datasheet, ComponentLink2URL=http://www.onsemi.com/pub/Collateral/LM2574-D.PDF, DatasheetVersion=Jul-1999, PackageDescription="DIP; 8 Leads; Row Spacing 7.62 mm; Pitch 2.54 mm", PackageReference=626-05, PackageVersion=1998, Published=15-Apr-2002, Publisher="Altium Limited"
U2: "800mA Low-Dropout Linear Regulator, 4-pin SOT-223", Manufacturer="National Semiconductor", PackageTopMarking=XYTT*N05B, PowerWise=N, Code_IPC=SOT223-4, Code_JEDEC=TO-261-AA, ComponentLink1Description="LM1117 Datasheet", ComponentLink1URL=http://www.national.com/ds/LM/LM1117.pdf, ComponentLink2Description="LM1117 Web Page", ComponentLink2URL=http://www.national.com/pf/LM/LM1117.html, ComponentLink3Description="MP04A Package Page", ComponentLink3URL=http://www.national.com/packaging/folders/mp04a.html, CompType="LDO IC", DatasheetVersion=Apr-2006, PackageDescription="Molded SOT-223, 6.50 x 3.56 x 1.6mm Body, 4 Lead, 2.3mm Pitch", PackageReference=MP04A, PackageVersion="revB, Apr-2003", PartNumber=LM1117IMPX-3.3, PinCount=4, Published=1-Mar-2010, Publisher="Altium Limited", RoHS=N
U3: library part MSP430F2410TPMR, "16-bit Ultra-Low-Power Microcontroller, 56KB Flash, 4KB RAM, 12-Bit ADC, 2 USCIs, HW Multiplier 64-LQFP -40 to 105", Package="LQFP-64 Texas Instruments", Availability=Unavailable, MF="Texas Instruments", MP=MSP430F2410TPMR, Price=None, SnapEDA_Link=https://www.snapeda.com/parts/MSP430F2410TPMR/Texas%20Instruments/view-part/?ref=snap
U4: Package=None, Availability=Unavailable, MF="Analog Devices", MP=ADE7953, Price=None, SnapEDA_Link=https://www.snapeda.com/parts/ADE7953/Analog%20Devices/view-part/?ref=snap
U5: library part ADUM1411ARWZ-RL, "Digital Isolator CMOS 4-CH 1Mbps 16-Pin SOIC W T/R", Package="SOIC-16 Analog Devices", Availability=Unavailable, MF="Analog Devices", MP=ADUM1411ARWZ-RL, Price=None, SnapEDA_Link=https://www.snapeda.com/parts/ADUM1411ARWZ-RL/Analog%20Devices%20Inc./view-part/?ref=snap
U6: "Hex Inverter", Code_IPC=SOIC127P600-14, Code_JEDEC=MS-012-AB, ComponentLink1Description="Manufacturer Link", ComponentLink1URL=http://www.onsemi.com/, ComponentLink2Description=Datasheet, ComponentLink2URL=http://www.onsemi.com/pub/Collateral/SN74LS04-D.PDF, DatasheetVersion=1999, LatestRevisionDate=13-Apr-2006, LatestRevisionNote="IPC-7351 Footprint Added.", PackageDescription="14-Pin Small Outline Integrated Circuit 1.27 mm Pitch", PackageReference=751A-03, Published=15-Apr-2002, Publisher="Altium Limited"
U7: "ADI Isolated DC/DC Converter", Package=None, Availability=Unavailable, MF="Analog Devices", MP=ADUM5000, Price=None, SnapEDA_Link=https://www.snapeda.com/parts/ADUM5000/Analog%20Devices%20Inc./view-part/?ref=snap
U8: library part MAX485ESA, "Low-Power, Slew-Rate-Limited RS-485/RS-422 Transceiver", Code_IPC=SOIC127P600-8, Code_JEDEC=MS-012-AA, ComponentLink1Description="Manufacturer Link", ComponentLink1URL=http://www.maxim-ic.com/, ComponentLink2Description=Datasheet, ComponentLink2URL=http://pdfserv.maxim-ic.com/en/ds/MAX1487-MAX491.pdf, DatasheetVersion=Feb-1996, LatestRevisionDate=13-Apr-2006, LatestRevisionNote="IPC-7351 Footprint Added.", PackageDescription="8-Pin Small Outline Integrated Circuit 1.27 mm Pitch", PackageReference=NSO8, Published=16-Jan-2001, Publisher="Altium Limited"
U9: library part MAX3222CAP, "3.0V TO 5.5V, Low-Power, up to 1Mbps, True RS-232 Transceiver Using Four 0.1µF External Capacitor", Code_IPC=SOP65P780-20, Code_JEDEC=MO-150-AE, ComponentLink1Description="Manufacturer Link", ComponentLink1URL=http://www.maxim-ic.com/, ComponentLink2Description=Datasheet, ComponentLink2URL=http://pdfserv.maxim-ic.com/en/ds/MAX3222-MAX3241.pdf, DatasheetVersion=Mar-1999, LatestRevisionDate=29-May-2009, LatestRevisionNote="IPC-7351 Footprint Added.", PackageDescription="20-Pin Small Outline Package 0.65 mm Pitch", PackageReference=SSOP20, PackageVersion=1997, Published=16-Jan-2001, Publisher="Altium Limited"
U10: library part LM185LD-2.5, "Micropower Voltage Reference", ComponentLink1Description="Manufacturer Link", ComponentLink1URL=http://www.ti.com/, DatasheetVersion=Jan-1989, Note="Anode (pin 3) is in electrical contact with the case.", PackageDescription="Can; 3 Leads; Pin Circle Dia. 2.54 mm; Lead Dia. 0.48 mm (max)", PackageReference=LD003, PackageVersion=1989, Published=15-Apr-2002, Publisher="Altium Limited"
U11: "Current Loop Transmitter 8-Pin SOIC T/R", Package=None, Availability=Unavailable, MF="Texas Instruments", MP=XTR115UA/2K5E4, Price=None, SnapEDA_Link=https://www.snapeda.com/parts/XTR115UA/2K5E4/Texas%20Instruments/view-part/?ref=snap
U12: "General Purpose, Low Voltage, Low Power, Rail-to-Rail Output Operational Amplifiers, 5-pin SOT-23", Manufacturer="National Semiconductor", PackageTopMarking=A27A*XTT, PowerWise=Y, ComponentLink1Description="LPV321 Datasheet", ComponentLink1URL=http://www.national.com/ds/LP/LPV321.pdf, ComponentLink2Description="LPV321 Web Page", ComponentLink2URL=http://www.national.com/pf/LP/LPV321.html, ComponentLink3Description="MF05A Package Page", ComponentLink3URL=http://www.national.com/packaging/folders/mf05a.html, CompType=Amplifiers, DatasheetVersion=Oct-2006, LatestRevisionDate=13-Jan-2009, LatestRevisionNote="Sim Model Added.", PackageDescription="Molded SOT-23, .115 x .063 x .040 in Body, 5 Lead, .0375 in Pitch", PackageReference=MF05A, PackageVersion="revD, Aug-2008", PartNumber=LPV321M5, PinCount=5, Published=4-Dec-2008, Publisher="Altium Limited", RoHS=N
V1: library part "Res Varistor", "Varistor (Voltage-Sensitive Resistor)", Code_IPC=RESC2012, LatestRevisionDate=29-May-2009, LatestRevisionNote="IPC-7351 Footprint Added.", PackageDescription="Chip Resistor 0805 Case Size", PackageReference=6-0805, PackageVersion=Mar-2003, Published=24-Mar-1999, Publisher="Altium Limited"
Y1: "Crystal Oscillator", LatestRevisionDate=17-Jul-2002, LatestRevisionNote="Re-released for DXP Platform.", PackageDescription="Crystal, Thru-Hole; 2 Leads; Body 3.1 x 8.2 mm (Dia.xH)", PackageReference=R38, Published=8-Jun-2000, Publisher="Altium Limited"
Y2: library part XTAL, "Crystal Oscillator", LatestRevisionDate=17-Jul-2002, LatestRevisionNote="Re-released for DXP Platform.", PackageDescription="Crystal, Thru-Hole; 2 Leads; Body 3.1 x 8.2 mm (Dia.xH)", PackageReference=R38, Published=8-Jun-2000, Publisher="Altium Limited"

## Free pads (board coordinates)
  round 60 smd: 000(1122.05,1838.58) 000(1122.05,3157.48) 000(1413.39,1102.36) 000(1748.03,1192.91) 000(1748.03,1283.46) 000(1889.76,2531.5) 000(1984.25,2547.24) 000(2275.59,1362.2) 000(2283.46,1893.7) 000(2370.08,1779.53) 000(2421.26,1933.07) 000(2496.06,2976.38) 000(3185.04,3055.12) 000(3751.97,3370.08)
  round 60 smd far side: 000(2700.79,1125.98) 000(2968.5,1685.04) 000(3019.68,1779.53) 000(3165.35,1404.68)
  round 60 hole 28: 3(1014.68,4043.31)

## Via types
v1: diameter 32, hole 16, Top Layer to Bottom Layer, 157 vias

## Nets (pads, with @x,y where several pads share a name; then routed paths per layer and width w, separated by ;. In a path a pad name is that pad's centre, name@x,y a point inside that pad or via, vN(x,y) a via of type N, cw(c..) or ccw(c..) an arc to the next point about the centre after c; other vN are vias at no path point)
AC_N_MEDIDOR: D2.2 P2.1 | length 1045.6
  Top Layer w23.62: 2891.73,3635.83 2933.07,3677.17 v1(2933.07,3850.39)
  Top Layer w25: D2.2@2837.4,3635.83 2891.73,3635.83
  Bottom Layer w23.62: v1(2933.07,3850.39) 2976.38,3807.09 3354.33,3807.09 3469.49,3691.93 P2.1@3469.49,3534.45
AC_P_MEDIDOR: F1.1 P2.4 | length 2213
  Top Layer w25: F1.1@2574.8,3744.09 2578.74,3740.16 2866.14,3740.16 2893.7,3767.72 2893.7,3879.54 2941.16,3927.01 3005.75,3927.01 3043.31,3964.57 3043.31,4051.18 3059.06,4066.93 3318.9,4066.93 3378.54,4007.28 3378.54,3782.87 3574.8,3586.61 3574.8,3496.06 3620.3,3450.57 3976.16,3450.57 P2.4@4060.04,3534.45
ADE_RESET: C10.1 R7.1 U4.2 U5.14 | length 1819.9
  Top Layer w10: U5.14@1563.19,2015.79 1563.19,1917.12 1598.43,1881.89 v1(1799.21,1881.89) ; C10.1@1807.09,1662.99 1820.47,1662.99 1874.01,1716.54 v1(1874.01,1771.65) ; U4.2@2075,1451.58 2200.41,1451.58 v1(2233.47,1418.51) ; v1(2137.8,1771.65) 2137.8,1879.92 R7.1@2143.7,1885.83
  Bottom Layer w10: v1(1799.21,1881.89) 1866.14,1814.96 ; v1(2137.8,1771.65) 2098.43,1811.02 1870.08,1811.02 1870.08,1783.46 1858.27,1771.65 v1(1874.01,1771.65) 1884.32,1761.34 1967.37,1761.34 1968.06,1760.65 2050.37,1760.65 2174.78,1636.25 2174.78,1477.21 v1(2233.47,1418.51)
ADE_RX: U4.27 U5.13 | length 1440.5
  Top Layer w10: v1(1511.81,1917.32) 1513.19,1918.7 U5.13@1513.19,2015.79 ; U4.27@2026.77,1403.35 2026.77,1385.83 2032.95,1379.65 2171.34,1379.65 2188.97,1362.01 v1(2188.97,1314.96)
  Bottom Layer w10: v1(1511.81,1917.32) 1511.81,1889.76 1527.56,1874.02 1718.08,1874.02 1849.32,1742.78 1885.97,1742.78 1886.66,1743.47 1959.96,1743.47 1960.65,1742.78 2036.75,1742.78 2153.54,1625.98 2153.54,1457 2188.97,1421.58 v1(2188.97,1314.96)
ADE_TX: U4.26 U5.11 | length 1456.9
  Top Layer w10: U5.11@1413.19,2015.79 1413.39,2015.59 v1(1413.39,1940.94) ; U4.26@2007.09,1403.35 2007.09,1380.23 2025.55,1361.77 2138.23,1361.77 2161.42,1338.58 v1(2153.54,1338.58)
  Bottom Layer w10: v1(1413.39,1940.94) 1413.39,1877.95 1444.88,1846.46 1704.72,1846.46 1826.28,1724.9 2027.07,1724.9 2133.86,1618.11 2133.86,1434.57 2154.29,1414.13 2153.54,1413.39 v1(2153.54,1338.58)
ANALOG: C6.2 C7.1 C11.2 C12.1 C15.1 C16.2 C17.1 C18.2 C19.1 C20.2 P4.3 pad.000@2421.26,1933.07 R5.1 R6.2 R20.2 U4.14 U4.16 U4.EXP V1.2 | length 5062.8
  Top Layer w10: U4.16@1898.82,1530.32 U4.EXP@1948.03,1530.32 ; v1(1901.57,1625.98) 1901.57,1623.51 1928.34,1596.74 U4.14@1928.34,1579.53 1928.34,1550 U4.EXP@1948.03,1530.32 ; C11.2@1913.39,1277.95 1899.31,1277.95 1857.57,1236.22 1857.57,1176.47 v1(1854.33,1173.23) 1854.33,1043.31 1885.83,1011.81 2320.25,1011.81 2356.69,1048.25 R20.2@2356.69,1137.8 ; U4.EXP@1987.4,1490.95 U4.EXP@1948.03,1530.32 ; C12.1@2110.24,1202.36 C12.1@2122.05,1202.36 C12.1@2151.97,1202.36 ; v1(2141.73,1157.48) C12.1@2141.73,1196.85 ; 2457.87,1327.95 2542.13,1327.95 v1(2551.18,1318.9) ; C6.2@2457.87,1522.05 C17.1@2552.36,1522.05 ; v1(2555.11,1472.44) 2555.12,1519.29 C17.1@2552.36,1522.05 ; C16.2@2646.85,1522.05 C17.1@2552.36,1522.05 ; 2801.57,1384.25 2826.77,1384.25 ; 2830.9,1380.12 2850.39,1399.61 C15.1@2850.39,1521.65
  Bottom Layer w10: v1(1854.33,1173.23) v1@2141.73,1173.23 ; v1(1901.57,1625.98) 1901.57,1464.57 2141.73,1224.41 v1@2141.73,1173.23 ; v1@2153.54,1157.48 v1(2141.73,1157.48) v1@2141.73,1173.23 ; C7.1@2457.87,1319.68 2458.66,1318.9 2523.62,1318.9 ; C18.2@2533.07,1228.35 2523.62,1237.8 2523.62,1318.9 ; v1(2555.11,1472.44) v1@2555.11,1468.5 ; R5.1@2700.79,1308.66 2690.55,1318.9 v1(2551.18,1318.9) ; v1(3322.83,1523.62) 3322.83,1444.88 3232.28,1354.33 2885.83,1354.33 2807.09,1433.07 v1(2807.09,1468.5) v1@2555.11,1468.5 ; 2523.62,1318.9 v1(2551.18,1318.9) ; v1(2551.18,1318.9) 2555.11,1322.83 v1@2555.11,1468.5
  Bottom Layer w12: v1(2925.2,1980.32) 3480.31,1980.32 3666.34,1794.29 P4.3@3666.34,1565.94
BSL_RX: P6.14 U3.22 | length 1029.8
  Top Layer w10: v1(1803.15,3181.1) 1803.15,3177.17 1821.08,3195.09 U3.22@1902.17,3195.09
  Bottom Layer w10: P6.14@1085.43,3057.48 1096.06,3057.48 1138.46,3015.08 1292.95,3015.08 1305.94,3028.06 1554.91,3028.06 1597.11,3070.27 1597.11,3199.47 1615.49,3217.85 1782.15,3217.85 1803.15,3196.85 v1(1803.15,3181.1)
BSL_TX: P6.12 U3.13 | length 967.7
  Top Layer w10: v1(1625.98,3185.04) 1630.14,3185.04 1766.17,3049.02 U3.13@1766.17,3019.09 U3.13@1767,3018.26
  Bottom Layer w10: P6.12@1085.43,2957.48 1101.57,2957.48 1150.06,2909 1337.92,2909 1437.11,3008.19 1560.31,3008.19 1625.98,3073.86 v1(1625.98,3185.04)
CF1: pad.000@1122.05,1838.58 R26.2 U4.23 | length 1282.3
  Top Layer w10: pad.000@1122.05,1838.58 1218.11,1838.58 1218.11,1899.21 1228.35,1909.45 1447.16,1909.45 1553.46,1803.15 v1(1562.99,1803.15) ; v1(1917.32,1354.33) 1948.03,1385.04 U4.23@1948.03,1402.36
  Bottom Layer w10: v1(1562.99,1803.15) 1645.67,1803.15 1847.46,1601.35 1847.46,1376.94 1870.08,1354.33 v1(1917.32,1354.33)
CF2: pad.000@1413.39,1102.36 R25.2 U4.24 | length 2063.6
  Top Layer w10: R25.2@1367.72,1838.58 1322.84,1838.58 1292.68,1808.43 1292.68,1471.1 1318.9,1444.88 1374.02,1444.88 1381.57,1452.44 1381.57,1582.36 1401.57,1602.36 1472.44,1602.36 1519.68,1555.12 1519.68,1141.73 1555.12,1106.3 ; pad.000@1413.39,1102.36 1456.69,1106.3 1555.12,1106.3 ; U4.24@1967.72,1403.35 1967.72,1350.72 1939.58,1322.58 1875.6,1322.58 1809.06,1256.05 1809.06,1139.77 1775.59,1106.3 1555.12,1106.3
CURRENT_MEASUREMENTA: P4.2 R8.2 R11.1 | length 1418.6
  Top Layer w10: R8.2@3192.91,1320.87 3163.38,1320.87 3141.73,1342.52 3141.73,1800.51 3179.81,1838.58 R11.1@3278.74,1838.58 R11.1@3278.74,1752.76
  Top Layer w59.06: R11.1@3278.74,1752.76 3366.14,1665.35 3763.78,1665.35 P4.2@3863.19,1565.94
CURRENT_MEASUREMENTB: P4.1 R11.2 R12.2 | length 1810.9
  Top Layer w10: R12.2@3066.93,1375.98 3123.86,1432.91 3123.86,1934.88 3200.79,2011.81 3566.93,2011.81 3611.02,1967.72 R11.2@3611.02,1838.58
  Top Layer w59.06: R11.2@3611.02,1838.58 3697.64,1751.97 3874.02,1751.97 P4.1@4060.04,1565.94
GND: C1.1 C2.1 C3.1 C4.1 C5.1 C23.1 C24.1 C25.2 C29.2 C31.2 C32.2 C33.2 C34.2 D1.1 D2.4 D3.1 D4.2 D5.2 D8.A D9.A Eth1.1 Eth1.2 Eth1.7 P3.1 P3.4 P6.9 pad.000@1984.25,2547.24 pad.3 Q4.2 R16.2 R17.1 U1.4 U1.5 U1.6 U2.1 U3.63 U5.2 U5.7 U5.8 U6.7 U7.2 U7.4 U7.8 U8.5 U9.12 U9.18 | length 10720.3
  Top Layer w10: v1(1287.4,2874.01) 1287.4,2927.16 1295.28,2935.04 1372.05,2935.04 1500,3062.99 1500,3110.24 1494.14,3116.09 U3.63@1452.17,3116.09 ; v1(1362.2,4011.81) 1375.82,4011.81 C3.1@1430.94,3956.69 ; C25.2@1448.82,2586.61 1516.75,2518.68 1634.86,2518.68 1653.54,2500 1653.54,2468.5 1613.19,2428.15 U5.2@1613.19,2385.79 U5.2@1613.19,2367.58 ; 1736.22,2385.83 U7.8@1771.26,2385.83 ; Q4.2@2028.54,3210.63 2028.54,3228.98 2099.57,3300 2142,3300 2157,3285 2157,3254 2166.91,3244.09 v1(2192.91,3244.09) ; 2267.72,3011.81 2309.4,3011.81 2317.55,3019.96 ; U8.5@2313.39,3240.16 2313.39,3177.17 2326.77,3163.78 v1(2326.77,3137.8) ; v1(2514.96,3586.61) 2657.64,3586.61 2671.34,3572.92 2671.34,3572.74 2681.1,3562.98 2681.1,3518.38 2650.59,3487.86 U9.18@2650.59,3454.72 ; v1(2877.95,3578.74) 2878.21,3579 2920,3579 2950.59,3548.41 U9.12@2950.59,3454.72 ; v1(3728.35,2779.53) 3693.41,2814.46 3693.41,3031 3691.6,3032.81 3691.6,3108.92 3714.15,3131.48 3770.57,3131.48 3803.15,3164.06 v1(3803.15,3200.79) ; v1(4181.1,3460.63) 4228.35,3413.39 4228.35,3311.02 4295.28,3244.09 4744.09,3244.09 P3.4@4808.07,3180.12 ; Eth1.2@4506.3,3039.37 Eth1.1@4606.3,3039.37 ; Eth1.7@4606.3,2239.37 4741.34,2104.33 D4.2@4811.02,2104.33
  Bottom Layer w10: 1051.18,2807.09 1102.8,2807.09 1153.2,2857.48 P6.9@1185.43,2857.48 ; v1(1956.69,2480.32) 2006.4,2480.32 ; 2051.18,2909.45 2059.05,2917.32 v1(2098.43,2917.32) ; v1(2078.74,3818.9) 2092.11,3818.9 2126.04,3852.83 2157.42,3852.83 2191.36,3818.9 2419.9,3818.9 2475.02,3874.02 v1(2657.48,3874.02) ; C23.1@2259.84,3246.06 2257.87,3244.09 v1(2192.91,3244.09) 2192.91,3161.42 2216.54,3137.8 v1(2326.77,3137.8) ; R16.2@2421.26,3466.54 2483.54,3466.54 2514.96,3497.96 v1(2514.96,3586.61) 2531.5,3586.61 ; 2460.63,2602.36 2460.63,2685.04 v1(2614.17,2838.58) ; v1(2620,3025) 2590,3025 2535.43,3079.57 2535.43,3181.1 2547.24,3192.91 2732.28,3192.91 2739.76,3185.43 C31.2@2739.76,3141.73 ; C31.2@2742.13,3141.73 2742.13,3116.14 2767.72,3090.55 2862.2,3090.55 2875.98,3104.33 2875.98,3157.48 2874,3159.46 v1(2874,3228) 2874,3244.08 2883.46,3253.54 C29.2@2944.88,3253.54 2947.3,3253.54 3000,3200.84 3000,3065.47 ; v1(2877.95,3578.74) 2824.8,3578.74 2805.12,3598.43 2551.18,3598.43 ; 3370.08,2811.02 3442.71,2811.02 3474.2,2779.53 3693.7,2779.53 3683.46,2769.29 U6.7@3683.46,2690.94 ; v1(3803.15,3200.79) 3803.15,3234.6 3857.92,3289.37 C34.2@4000.14,3289.37 ; 3830.71,2952.76 3852.15,2931.32 3852.15,2921.21 ; P3.1@4217.52,3180.12 4228.02,3180.12 4358.27,3049.87 4358.27,2995.2 ; Eth1.1@4606.3,3039.37 4606.3,2996.06 4605.43,2995.2 ; P3.4@4790.2,3180.12 4790.2,3151.06 4800.67,3140.59 4808.07,3140.59 4808.07,3075.79 4727.48,2995.2 4605.43,2995.2 ; D5.2@4811.02,2037.4 4844.49,2037.4 4854.33,2047.24 4854.33,2204.72 4819.69,2239.37 Eth1.7@4606.3,2239.37 4606.3,2271.65 4594.41,2283.54 3877.78,2283.54 3852.15,2309.18 3852.15,2921.21 ; 2531.5,3586.61 2547.24,3602.36 2551.18,3598.43 ; 2531.5,3586.61 2539.37,3586.61 2551.18,3598.43 ; 3852.15,2921.21 3858.27,2927.33 3858.27,2984.25 3869.17,2995.16 4220.47,2995.16 4220.51,2995.2 4358.27,2995.2 ; 4358.27,2995.2 4605.43,2995.2
  other v1: 1248.03,2366.14 1740.16,2476.38 2645.67,4011.81
"GND A": C22.1 C35.1 C36.1 C37.1 C38.1 pad.000@3185.04,3055.12 R17.2 U3.11 U3.62 U10.2 U11.3 U12.2 | length 5719.6
  Top Layer w10: v1(1295.28,3944.88) C38.1@1295.28,3888.19 1262.2,3888.19 1248.94,3874.92 1248.94,3510.91 1271.65,3488.19 C37.1@1322.83,3488.19 1330.71,3480.31 1330.71,3421.26 1314.96,3405.51 ; C36.1@1326.77,3356.69 1314.96,3368.5 1314.96,3405.51 ; U10.2@1931.1,2939.96 1745.08,2939.96 1726.17,2958.87 U3.11@1726.17,3019.09 1726.17,3060.28 1635.53,3150.91 1510.88,3150.91 1496.06,3136.09 U3.62@1452.17,3136.09 1451.54,3136.72 1410.73,3136.72 1345.69,3201.77 1254.93,3201.77 1206.57,3250.12 1206.57,3273.74 1206.22,3274.09 1206.22,3332.84 1206.48,3333.1 1206.48,3383.64 1228.35,3405.51 1314.96,3405.51 ; R17.2@2848.43,4015.75 2860.24,4003.94 v1(2976.38,4003.94) ; v1(3177.17,3732.28) 3177.17,3796.11 U11.3@3183.27,3802.21 ; v1(3437.01,3354.33) 3494.09,3354.33 3494.09,3321.18 3535.35,3279.92 3744.49,3279.92 3865.24,3400.67 3905.92,3400.67 3925.2,3381.4 U12.2@3925.2,3271.65
  Bottom Layer w10: v1(1295.28,3944.88) 1295.28,4027.56 1338.9,4071.18 v1(2913.39,4071.18) ; v1(2976.38,4003.94) 2929.13,4003.94 2867.64,3942.44 2867.64,3821.34 2956.7,3732.28 3173.24,3732.28 v1(3177.17,3732.28) 3299.2,3732.28 3307.08,3724.4 3311.02,3728.35 3397.64,3641.73 3397.64,3622.05 ; v1(3429.13,3653.54) 3397.64,3622.05 ; v1(3437.01,3354.33) 3437.01,3362.2 3397.64,3401.57 3397.64,3622.05
IAN: C20.1 pad.000@3019.68,1779.53 R12.1 U4.6 | length 1965
  Top Layer w10: U4.6@2075.98,1530.32 2223.23,1530.32 v1(2263.78,1570.87) ; C20.1@3043.31,1830.71 3043.31,1816.26 3035.43,1808.38 3035.43,1771.65 ; R12.1@3066.93,1316.93 3021.65,1316.93 3003.94,1334.65 3003.94,1433.07 3035.43,1464.57 3035.43,1771.65 ; v1(3094.49,1712.6) 3094.49,1759.84 3082.68,1771.65 3035.43,1771.65
  Bottom Layer w10: v1(2263.78,1570.87) 2265.09,1572.18 3044.62,1572.18 3094.49,1622.05 v1(3094.49,1712.6) 3094.49,1749.33 3064.29,1779.53 pad.000@3019.68,1779.53
IAP: C19.2 pad.000@3165.35,1404.68 R8.1 U4.5 | length 1598.5
  Top Layer w10: U4.5@2075,1510.63 2294.1,1510.63 v1(2326.77,1543.31) ; R8.1@3192.91,1379.92 3236.22,1423.23 v1(3236.22,1523.62) 3236.22,1612.21 C19.2@3230.32,1618.11
  Bottom Layer w10: v1(2326.77,1543.31) 3216.54,1543.31 v1(3236.22,1523.62) 3236.22,1460.63 3180.27,1404.68 pad.000@3165.35,1404.68
INXTR: C22.2 C35.2 pad.000@3751.97,3370.08 R21.2 U12.3 U12.4 | length 1472.2
  Top Layer w10: R21.2@3118.51,3394.87 R21.2@3122.05,3391.34 3122.05,3342.52 3145.67,3318.9 3295.28,3318.9 3318.9,3342.52 3318.9,3391.34 3312.6,3391.34 3346.46,3425.2 3746.35,3425.2 3754.45,3417.1 3754.45,3364.68 3741.01,3351.25 3741.01,3311.88 3726.93,3297.8 3582.2,3297.8 3582.2,3325.28 C35.2@3553.15,3354.33 ; 3754.45,3423.23 3935.04,3423.23 3962.6,3395.67 U12.4@3962.6,3366.14 U12.3@3962.6,3271.65
IRQAD: R2.1 U4.22 U5.12 | length 1320.4
  Top Layer w10: U5.12@1463.19,2015.79 1463.19,1918.7 1550.45,1831.44 1551.03,1832.02 1667.98,1832.02 v1(1685.04,1814.96) 1685.04,1826.77 1692.91,1834.65 1928.08,1834.65 1928.16,1834.57 2019.61,1834.57 2033.86,1848.82 R2.1@2033.86,1880.91 ; v1(1885.83,1389.76) 1915.74,1389.76 U4.22@1928.34,1402.36
  Bottom Layer w10: v1(1685.04,1814.96) 1866.14,1633.86 1866.14,1409.45 v1(1885.83,1389.76)
ISL_A: D9.C P2.2 R10.2 R13.1 U8.6 | length 4799.2
  Top Layer w10: v1(2251.97,3346.46) 2251.97,3349.51 2253,3350.54 2283.54,3320 2338,3320 2363.39,3294.61 U8.6@2363.39,3240.16 ; v1(2314.96,3877.95) 2314.96,3901.57 2334.65,3921.26 2417.32,3921.26 2433.07,3937.01 2433.07,4043.31 2489.82,4100.06 3321.66,4100.06 3411.67,4010.05 3411.67,3840.3 3666.34,3585.63 P2.2@3666.34,3534.45
  Bottom Layer w10: v1(2251.97,3346.46) 2251.97,3390.77 2253,3391.8 2238.76,3406.04 2176.64,3406.04 2141.73,3440.94 2141.73,3479.24 2161.42,3498.93 ; R13.1@2271.65,3466.54 2229.51,3466.54 2197.12,3498.93 2183,3498.93 ; v1(2314.96,3877.95) 2314.96,3940.94 2279.53,3976.38 2279.53,3980.32 1992.13,3980.32 1961.94,3950.13 1961.94,3683.72 2146.74,3498.93 2161.42,3498.93 ; R10.2@2570.87,3545.67 2583.23,3545.67 2612.36,3574.8 2704.72,3574.8 2729.66,3549.87 2889.91,3549.87 2906.83,3566.78 2906.83,3613.17 2880.89,3639.11 2253.28,3639.11 2192.13,3577.95 2192.13,3508.05 2183,3498.93 ; P2.2@3667.32,3533.46 P2.2@3666.34,3534.45 3666.34,3508.74 D9.C@3733.07,3442.01 ; 2161.42,3498.93 2183,3498.93
ISL_B: D8.C P2.3 R13.2 R16.1 U8.7 | length 3269.3
  Top Layer w10: v1(2141.73,3814.96) 2177.17,3814.96 2206.85,3785.28 2206.85,3564.15 v1(2221,3550) ; U8.7@2413.39,3240.16 2413.39,3302.15 2415.88,3304.65 2468.44,3304.65 2498,3334.2 2498,3539 2477.95,3559.05 v1(2484.25,3559.05)
  Bottom Layer w10: v1(2141.73,3814.96) 2186.69,3770 2418,3770 2490,3842 2741.92,3842 2953.23,4053.31 3324.65,4053.31 3629.06,3748.9 3629.06,3663.41 3628.2,3662.55 3628.2,3631.02 3661.3,3597.91 3798.7,3597.91 3799.21,3598.43 P2.3@3863.19,3534.45 3863.19,3510.55 D8.C@3929.92,3443.82 ; v1(2221,3550) 2247.25,3550 2275.12,3522.13 2417.79,3522.13 2454.72,3559.05 v1(2484.25,3559.05)
M_GND: C8.2 C9.1 C13.1 C14.1 C26.1 C27.2 D10.2 D11.2 pad.000@2283.46,1893.7 R20.1 U4.4 U4.25 U5.9 U5.10 U5.15 U7.9 U7.13 U7.15 | length 3630.9
  Top Layer w10: U5.15@1613.19,2015.79 1613.19,1973.42 v1(1657.48,1929.13) ; 1732.28,1358.27 1789.37,1358.27 C14.1@1791.34,1356.3 ; v1(1952.76,1078.74) 1952.76,1094.49 1968.5,1110.24 1968.5,1311.02 1987.4,1329.92 U4.25@1987.4,1403.35 ; 1984.64,1311.02 C8.2@2017.72,1277.95 C8.2@2017.72,1300.39 ; U4.4@2075,1490.95 2320.08,1490.95 v1(2326.77,1484.25) 2347.77,1463.25 2347.77,1290.06 2297.64,1239.93 2297.64,1137.8 ; v1@2291.34,1960.63 2405.51,1846.46 2490.16,1846.46 2513.78,1822.83 2513.78,1899.61 2543.31,1929.13 2696.85,1929.13 2727.56,1898.43 C27.2@2727.56,1827.17
  Bottom Layer w10: v1(1657.48,1929.13) 2244.09,1929.13 v1(2287.4,1972.44) v1(2287.4,1736.22) ; v1(1952.76,1078.74) 1952.76,1074.8 1944.88,1066.93 1988.19,1023.62 2267.72,1023.62 2317.58,1073.48 2345.14,1073.48 2350.39,1078.74 2350.39,1187.68 2350.89,1188.17 2350.89,1460.14 v1(2326.77,1484.25)
  other v1: 1712.6,1362.2 1715.47,1609.17 1043.31,1996.06
M_V3V3: C10.2 C11.1 C12.2 C26.2 C27.1 pad.000@2370.08,1779.53 Q1.3 Q2.3 R2.2 R7.2 U4.7 U4.8 U4.17 U4.28 U5.16 U7.10 U7.16 | length 6636.9
  Top Layer w12: 1744.09,1738.58 1744.09,1633.86 1763.78,1614.17 1818.7,1614.17 1838.58,1594.29 1838.58,1539.37 1867.32,1510.63 U4.17@1899.8,1510.63 ; R2.2@1958.27,1880.91 R2.2@1958.27,1884.84 ; 1958.27,1934.65 1964.57,1940.94 ; U4.28@2046.46,1402.36 2175.31,1402.36 2228.35,1349.33 2228.35,1295.28 2204.72,1271.65 2204.72,1259.84 ; U4.8@2046.46,1579.53 2062.2,1579.53 ; U4.7@2075.98,1550 2075.98,1565.75 2062.2,1579.53 ; v1(2102.36,1574.8) 2097.64,1579.53 2062.2,1579.53 ; 2118.11,1940.94 2118.5,1941.34